# Altium PCB STC12C5A60S2 DEMO R1A.PcbDoc
Units mm, origin at the board's own origin, x right, y up, seen from the top; angles counter-clockwise.
Board outline 20.32 x 56.5 mm, 2 copper layers (Top Layer, Bottom Layer); 42 components, 59 nets, 186 pads, 32 vias.
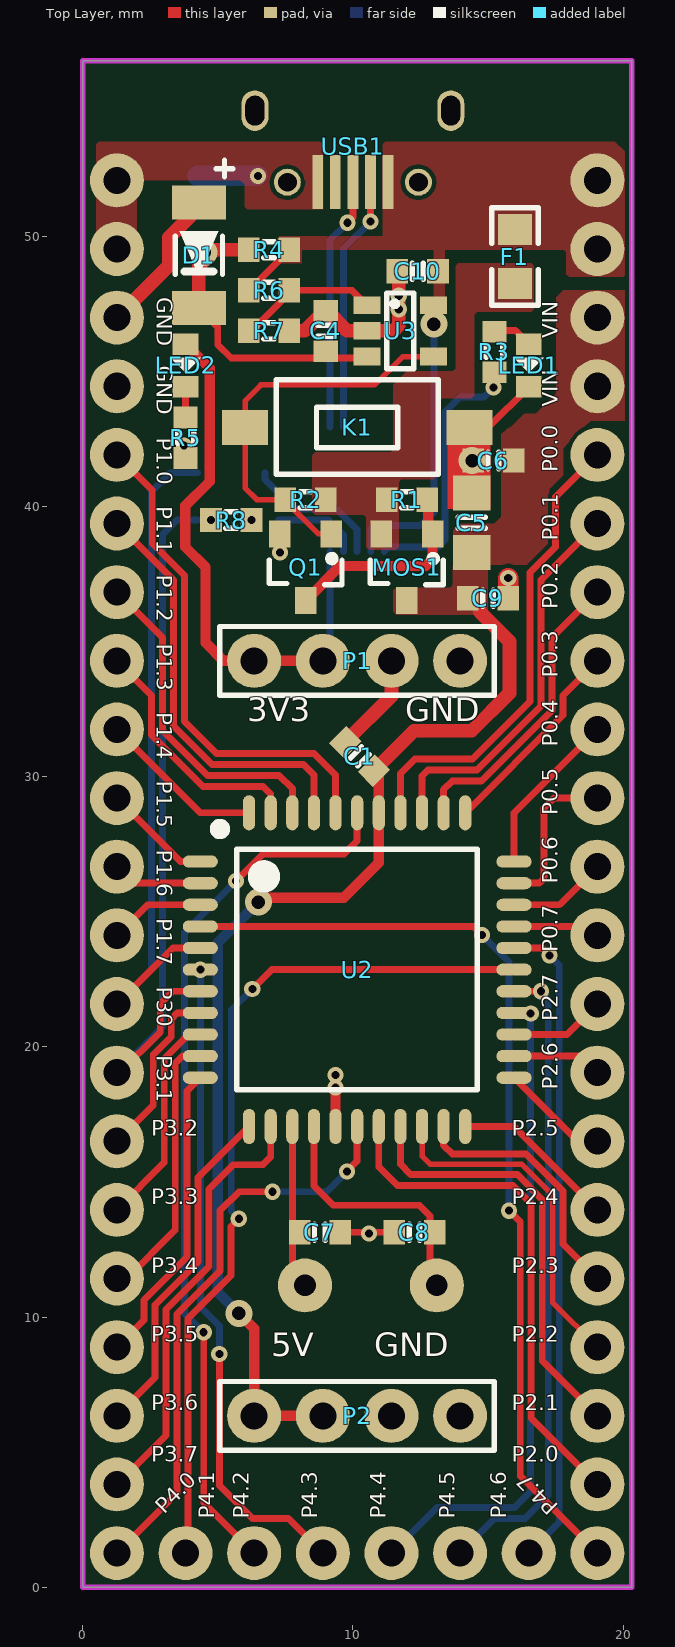
[diagram p0: Top Layer view]
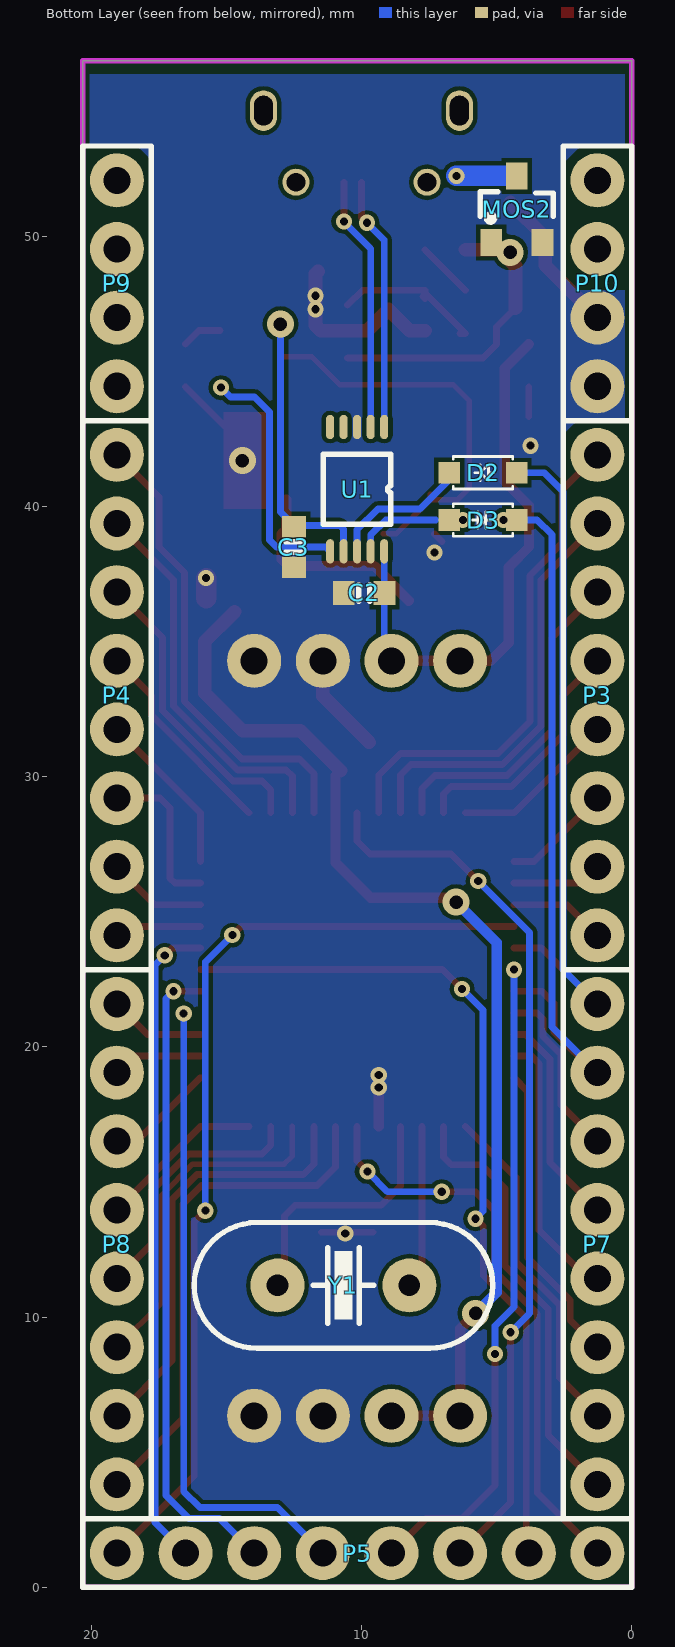
[diagram p1: Bottom Layer view, seen from below]

## Layer stack, top to bottom
Top Solder: solder mask 0.0102, Solder Resist, Dk 3.5
Top Layer: signal copper 0.0356
Dielectric1: dielectric 0.32, FR-4, Dk 4.8
Bottom Layer: signal copper 0.0356
Bottom Solder: solder mask 0.0102, Solder Resist, Dk 3.5

## Board outline
0,0 20.32,0 20.32,56.5 0,56.5

## Design rules (kind name [scope] priority, off if disabled: settings)
Clearance power [InNetClass('power') vs InNetClass('power')] p1: gap=0.254
Clearance [All] p2: gap=0.152
ComponentClearance [All] p1: gap=0 collisioncheckmode=3 verticalgap=0 showdistances=FALSE
PlaneConnect [All] p1: planeconnectstyle=Direct reliefexpansion=0.508 reliefentries=4 reliefconductorwidth=0.254 reliefairgap=0.254
PolygonConnect [All] p1: connectstyle=Direct reliefconductorwidth=0.254 reliefentries=4 polygonreliefangle="90 Angle" airgapwidth=0.254
RoutingVias [All] p1: holewidth=0.3 width=0.6 viastyle="Through Hole" minholewidth=0.3 minwidth=0.6 maxholewidth=6 maxwidth=6.3
SolderMaskExpansion [All] p1: expansion=0.102
Width [All] p1: maxlimit=25.4 minlimit=0.152 preferedwidth=0.254
28 further rules are at their usual default settings.

## Components (designator, comment, footprint, x,y, rotation, side; value= is the part's Value field where it differs from the comment)
C1 "0.1μF" C_0603 10.25,30.75 r135 top
C2 "0.1μF" C_0603 9.9,36.8 r180 bottom
C3 "0.1μF" C_0603 12.5,38.5 r90 bottom
C4 "10nF" C_0603 9,46.5 r90 top
C5 "22μF" C_0805 14.4,39.4 r90 top
C6 "10μF" C_0603 15.2,41.7 r180 top
C7 "22pF" C_0603 8.78,13.14 r0 top
C8 "22pF" C_0603 12.28,13.14 r180 top
C9 "10μF" C_0603 15,36.6 r0 top
C10 "0.1μF" C_0603 12.4,48.7 r180 top
D1 "ZMM3V3" SOD_80 4.3,49.3 r270 top
D2 "1N4148WS" SOD_323 5.5,41.25 r0 bottom
D3 "1N4148WS" SOD_323 5.5,39.5 r180 bottom
F1 "6V 1.1A 0805" FB_0805 16,49.25 r270 top
K1 "TACT SWITCH_2_SMD" "TACT SWITCH_2_SMD" 10.16,42.926 r180 top
LED1 "LED_0603-B" LED_0603-B 16.51,45.22 r270 top
LED2 "LED_0603-G" LED_0603-G 3.81,45.22 r270 top
MOS1 "SI2301" SOT_23_3 12,37.75 r180 top
MOS2 "AO3400A" SOT_23_3 4.25,51 r180 bottom
P1 "PIN4" PIN_4 10.16,34.29 r180 top
P2 "PIN4" PIN_4 10.16,6.35 r180 top
P3 "PIN8" PIN_8 1.27,33.02 r270 bottom
P4 "PIN8" PIN_8 19.05,33.02 r90 bottom
P5 "PIN8" PIN_8 10.16,1.27 r0 bottom
P7 "PIN8" PIN_8 1.27,12.7 r270 bottom
P8 "PIN8" PIN_8 19.05,12.7 r90 bottom
P9 "PIN4" PIN_4 19.05,48.26 r270 bottom
P10 "PIN4" PIN_4 1.27,48.26 r270 bottom
Q1 "2N7002" SOT_23_3 8.25,37.75 r180 top
R1 "100kΩ" R_0603 12,40.25 r180 top
R2 "47kΩ" R_0603 8.25,40.25 r0 top
R3 "2.2KΩ" R_0603 15.24,45.72 r90 top
R4 "470Ω" R_0603 6.9,49.5 r0 top
R5 "2.2KΩ" R_0603 3.81,42.545 r270 top
R6 "22kΩ" R_0603 6.9,48 r180 top
R7 "33kΩ" R_0603 6.9,46.5 r180 top
R8 "100Ω" R_0603 5.5,39.5 r180 top
U1 "CH340E" MSOP_10 10.16,40.64 r270 bottom
U2 "STC12LEXXS2" LQFP_44 10.16,22.86 r270 top locked
U3 "TL331" SOT_23_5 11.75,46.5 r270 top
USB1 "MICRO USB B" "MICRO USB B" 10,52 r0 top
Y1 "11.0592MHz" CRYSTAL_HC_49US 10.668,11.176 r0 bottom

## Footprints (in the part's own frame and the unit in brackets; to place one, negate y for a bottom-side part, rotate by r counter-clockwise, add the part's x,y. Pads: shape width x height; smd on the part's side, far side on the other; paste and mask are expansions set on the pad)
C_0603 [mm]
  rect 0.8x0.9 smd: 1(-0.75,0) 2(0.75,0)
  silkscreen extent -0.2,-0.3 0.2,0.3, body extent -0.76,-0.39 0.76,0.39, height 0.9
C_0805 [mm]
  rect 1.3x1.4 smd: 1(-1.1,0) 2(1.1,0)
  silkscreen extent -0.2,-0.5 0.2,0.5, body extent -1,-0.63 1,0.62, height 0.78
CRYSTAL_HC_49US [mm]
  round 2 hole 0.8: 1(-2.44,0) 2(2.44,0)
  silkscreen extent -5.53,-2.33 5.53,2.32, body extent -5.52,-2.32 5.53,2.33, height 2.49
FB_0805 [mm]
  rect 1.14x1.27 smd: 1(-1.003,0) 2(1.003,0)
  silkscreen extent -1.8,-0.86 1.8,0.86, body extent -1,-0.62 1,0.63, height 0.85
LED_0603-B [mm]
  rect 0.8x0.96 smd: 1(-0.79,0) 2(0.79,0)
  silkscreen extent -0.28,-0.56 0.28,0.56, body extent -0.85,-0.45 0.85,0.45, height 0.9
LED_0603-G [mm]
  rect 0.8x0.96 smd: 1(-0.79,0) 2(0.79,0)
  silkscreen extent -0.28,-0.56 0.28,0.56, body extent -0.85,-0.45 0.85,0.45, height 0.9
LQFP_44 [mm]
  oval 0.45x1.3 smd: 1(-4,-5.804) 2(-3.2,-5.804) 3(-2.4,-5.804) 4(-1.6,-5.804) 5(-0.8,-5.804) 6(0,-5.804) 7(0.8,-5.804) 8(1.6,-5.804) 9(2.4,-5.804) 10(3.2,-5.804) 11(4,-5.804) 23(4,5.804) 24(3.2,5.804) 25(2.4,5.804) 26(1.6,5.804) 27(0.8,5.804) 28(0,5.804) 29(-0.8,5.804) 30(-1.6,5.804) 31(-2.4,5.804) 32(-3.2,5.804) 33(-4,5.804)
  oval 1.3x0.45 smd: 12(5.804,-4) 13(5.804,-3.2) 14(5.804,-2.4) 15(5.804,-1.6) 16(5.804,-0.8) 17(5.804,0) 18(5.804,0.8) 19(5.804,1.6) 20(5.804,2.4) 21(5.804,3.2) 22(5.804,4) 34(-5.804,4) 35(-5.804,3.2) 36(-5.804,2.4) 37(-5.804,1.6) 38(-5.804,0.8) 39(-5.804,0) 40(-5.804,-0.8) 41(-5.804,-1.6) 42(-5.804,-2.4) 43(-5.804,-3.2) 44(-5.804,-4)
  silkscreen extent -5.33,-5.2 4.45,4.45, body extent -6,-6 6,6, height 1.68
"MICRO USB B" [mm]
  oval 1x1.5 hole 0.7 slot 1.1 at 90 deg: 0(-3.625,2.65) 0(3.625,2.65)
  round 1 hole 0.7: 0(-2.425,0) 0(2.425,0)
  rect 0.4x2 smd: 1(1.3,0) 2(0.65,0) 3(0,0) 4(-0.65,0) 5(-1.3,0)
  body extent -4.1,-0.11 4.1,5.32, height 2.63
MSOP_10 [mm]
  oval 0.9x0.3 smd: 1(-2.3,1) 2(-2.3,0.5) 3(-2.3,0) 4(-2.3,-0.5) 5(-2.3,-1) 6(2.3,-1) 7(2.3,-0.5) 8(2.3,0) 9(2.3,0.5) 10(2.3,1)
  round 0.5 on Bottom Overlay: 1(-0.8,0.7)
  silkscreen extent -1.3,-1.25 1.3,1.25, body extent -2.51,-1.5 2.51,1.5, height 1.05
PIN_4 [mm]
  round 2 hole 1: 1(-3.81,0) 2(-1.27,0) 3(1.27,0) 4(3.81,0)
  silkscreen extent -5.08,-1.27 5.08,1.27, body extent -5.08,-1.27 5.08,1.27, height 8.51
PIN_8 [mm]
  round 2 hole 1: 1(-8.89,0) 2(-6.35,0) 3(-3.81,0) 4(-1.27,0) 5(1.27,0) 6(3.81,0) 7(6.35,0) 8(8.89,0)
  silkscreen extent -10.16,-1.27 10.16,1.27, body extent -10.16,-1.27 10.16,1.27, height 8.51
R_0603 [mm]
  rect 0.8x0.9 smd: 1(-0.75,0) 2(0.75,0)
  silkscreen extent -0.2,-0.3 0.2,0.3, body extent -0.76,-0.38 0.76,0.38, height 0.41
SOD_80 [mm]
  rect 1.25x2 smd: 1(-1.951,0) 2(1.951,0)
  silkscreen extent -3.52,-0.87 0.76,1.26, body extent -1.85,-0.85 1.85,0.85, height 1.7
SOD_323 [mm]
  rect 0.8x0.8 smd: 1(-1.25,0) 2(1.25,0)
  silkscreen extent -1.1,-0.6 1.1,0.6, body extent -1.3,-0.67 1.3,0.68, height 1.1
SOT_23_3 [mm]
  rect 0.8x1 smd: 1(-0.95,-1.235) 2(0.95,-1.235) 3(0,1.235)
  silkscreen extent -1.35,-0.45 1.35,0.65, body extent -1.45,-1.19 1.45,1.19, height 1.02
SOT_23_5 [mm]
  rect 0.65x1 smd: 1(-0.95,-1.235) 2(0,-1.235) 3(0.95,-1.235) 4(0.95,1.235) 5(-0.95,1.235)
  silkscreen extent -1.4,-0.5 1.4,0.5, body extent -1.45,-1.19 1.45,1.19, height 1.02
"TACT SWITCH_2_SMD" [mm]
  rect 1.7x1.3 smd: 1(-4.15,0) 2(4.15,0)
  silkscreen extent -3,-1.76 3,1.74, body extent -4,-1.8 4,1.8, height 2.4

## Part data
C1 C2 C3 C4 C6 C7 C8 C9 C10: library part C_0603
C5: library part C_0805
D1: library part ZMMxxV
F1: library part FUSE_0805
R1 R2 R3 R4 R5 R6 R7 R8: library part R_0603
U2: library part "STC12LE5AXXS2 - LQPF44"
Y1: library part Crystal_HC_49US

## Via types
v1: diameter 0.6, hole 0.3, Top Layer to Bottom Layer, 27 vias
v2: diameter 1, hole 0.5, Top Layer to Bottom Layer, 5 vias

## Nets (pads, with @x,y where several pads share a name; then routed paths per layer and width w, separated by ;. In a path a pad name is that pad's centre, name@x,y a point inside that pad or via, vN(x,y) a via of type N, cw(c..) or ccw(c..) an arc to the next point about the centre after c; other vN are vias at no path point)
3V3: C2.2 LED2.1 P1.3 P1.4 U1.10 | length 20.9
  Top Layer w0.381: LED2.1 4.7,45.12 4.7,40.925 3.8,40.025 3.8,38.5 4.55,37.75 4.55,34.95 5.21,34.29 P1.4 P1.3
  Bottom Layer w0.254: P1.3 9.16,34.56 U1.10
D+: U1.1@9.16,42.94 USB1.3 | length 9.4
  Top Layer w0.254: v1(9.8,50.5) 10,50.7 USB1.3
  Bottom Layer w0.254: U1.1@9.16,42.94 9.16,49.86 v1(9.8,50.5)
D-: U1.2 USB1.2 | length 9.5
  Top Layer w0.254: v1(10.65,50.55) USB1.2
  Bottom Layer w0.254: U1.2 9.66,49.541 10.65,50.531 v1(10.65,50.55)
GND: C1.2 C2.1 C3.1 C4.2 C5.2 C6.2 C7.2 C8.2 C9.2 C10.2 D1.1 K1.1 LED1.2 MOS2.2 P1.1 P1.2 P2.1 P2.2 P10.3 P10.4 Q1.2 R5.2 R7.1 U1.3 U2.16 U3.2 | length 24.1
  Top Layer w0.254: Q1.2@7.025,38.71 Q1.2 ; C7.2@9.57,13.14 C8.2@11.49,13.14 ; K1.1 15.006,42.926 LED1.2
  Top Layer w0.381: U2.16 v1(9.36,18.96)
  Top Layer w0.508: P10.3 3.2,48.92 3.2,49.951 D1.1@4.5,51.251 ; R7.1 8.21,46.5 9,47.29 9.79,46.5 U3.2 11.5,46.5 11.7,46.7 11.7,48.61 C10.2@11.61,48.7 ; C1.2 11.43,32.991 P1.2
  Top Layer w0.762: C5.2@14.31,40.59 C5.2 ; C9.2 v1(15.75,37.35)
  other v1: 10.6,13.1 9.36,18.5 7.3,38.3 3.75,42.25 11.7,47.3 11.7,47.8
  other v2: 14.41,41.7
NetC7_1: C7.1 U2.14 Y1.1 | length 6.5
  Top Layer w0.254: U2.14 7.76,10.882 Y1.1@7.974,10.668
NetC8_1: C8.1 U2.15 Y1.2 | length 10
  Top Layer w0.254: U2.15 8.56,14.86 9.28,14.14 12.46,14.14 12.854,13.746 Y1.2@12.854,10.668
NetD2_2: D2.2 U1.8 | length 5.2
  Bottom Layer w0.254: D2.2 6.75,41 7.844,39.906 9.394,39.906 10.16,39.14 U1.8
NetD3_1: D3.1 R8.1 U1.9 | length 3.2
  Bottom Layer w0.254: 7.25,39.5 9.1,39.5 9.66,38.94 U1.9
  other v1: 6.25,39.5
NetF1_2: F1.2 MOS1.2 R1.2 R2.2
NetK1_2: K1.2 Q1.1 R2.1 U3.4 | length 15
  Top Layer w0.203: R2.1@7.46,40.46 R2.1@7.46,40.25 ; Q1.1 8.725,38.985 R2.1@7.46,40.25 ; U3.4 11.85,45.55 10.8,44.5 6.6,44.5 6.01,43.91 K1.2 6.01,40.69 6.45,40.25 R2.1@7.46,40.25
NetLED1_1: LED1.1 R3.2 | length 1.5
  Top Layer w0.254: R3.2@15.24,46.51 16.01,46.51 LED1.1
NetLED2_2: LED2.2 R5.1 | length 1.1
  Top Layer w0.254: R5.1@3.81,43.335 LED2.2
NetMOS1_1: MOS1.1 Q1.3 R1.1 | length 7.6
  Top Layer w0.381: Q1.3 9.535,37.8 12.7,37.8 12.95,38.05 MOS1.1 12.79,39.145 R1.1@12.79,40.25
NetP3_1: P3.1 U2.40 | length 18.7
  Top Layer w0.254: P3.1 2.575,40.605 2.575,38.64 3.769,37.446 3.769,32.045 4.954,30.859 8.561,30.859 9.36,30.06 U2.40
NetP3_2: P3.2 U2.41 | length 15.7
  Top Layer w0.254: P3.2 3.362,37.278 3.362,31.877 4.786,30.453 8.167,30.453 8.56,30.06 U2.41
NetP3_3: P3.3 U2.42 | length 12.4
  Top Layer w0.254: P3.3 2.956,35.144 2.956,31.708 4.618,30.046 7.274,30.046 7.76,29.56 U2.42
NetP3_4: P3.4 U2.43 | length 9.3
  Top Layer w0.254: P3.4 2.549,33.011 2.549,31.54 4.449,29.64 6.68,29.64 6.96,29.36 U2.43
NetP3_5: P3.5 U2.44 | length 6.2
  Top Layer w0.254: P3.5 4.356,28.664 U2.44
NetP3_6: P3.6 U2.1 | length 4.1
  Top Layer w0.254: P3.6 3.62,26.86 U2.1
NetP3_7: P3.7 U2.2 | length 3.3
  Top Layer w0.254: P3.7 1.88,26.06 U2.2
NetP3_8: P3.8 U2.3 | length 3.6
  Top Layer w0.254: P3.8 2.4,25.26 U2.3
NetP4_1: P4.1 U2.30 | length 3.2
  Top Layer w0.254: U2.30 18.72,24.46 P4.1
NetP4_2: P4.2 U2.31 | length 3.7
  Top Layer w0.254: U2.31 17.64,25.26 P4.2
NetP4_3: P4.3 U2.32 | length 5.9
  Top Layer w0.254: U2.32 16.9,26.06 17.08,26.24 17.08,28.84 17.45,29.21 P4.3
NetP4_4: P4.4 U2.33 | length 6.2
  Top Layer w0.254: U2.33 15.964,28.664 P4.4
NetP4_5: P4.5 U2.34 | length 7.7
  Top Layer w0.254: U2.34 17.771,32.275 17.771,33.011 P4.5
NetP4_6: P4.6 U2.35 | length 11.2
  Top Layer w0.254: U2.35 13.36,29.52 13.68,29.84 14.761,29.84 17.364,32.443 17.364,35.144 P4.6
NetP4_7: P4.7 U2.36 | length 14.5
  Top Layer w0.254: U2.36 12.56,30.02 12.786,30.246 14.593,30.246 16.958,32.611 16.958,37.278 P4.7
NetP4_8: P4.8 U2.37 | length 17.5
  Top Layer w0.254: U2.37 11.76,30.12 12.293,30.653 14.425,30.653 16.551,32.78 16.551,37.551 17.5,38.5 17.5,40.36 P4.8
NetP5_1: P5.1 U2.17 | length 21.4
  Top Layer w0.254: P5.1 3.494,3.494 3.494,10.121 5.086,11.713 5.086,13.946 5.78,14.64 v1(7.03,14.64) ; v1(9.78,15.39) 10.16,15.77 U2.17
  Bottom Layer w0.254: v1(7.03,14.64) 9.03,14.64 v1(9.78,15.39)
NetP5_2: P5.2 U2.28 | length 32.2
  Top Layer w0.254: P5.2 P5.2@3.901,1.361 ; P5.2@3.999,1.459 P5.2@3.901,1.361 ; v1(5.78,13.64) 5.493,13.353 5.493,11.545 3.901,9.952 P5.2@3.901,1.361 ; v1(6.28,22.14) 7,22.86 U2.28
  Bottom Layer w0.254: v1(5.78,13.64) 5.5,13.92 5.5,21.36 v1(6.28,22.14)
NetP5_3: P5.3 U2.39 | length 32.9
  Top Layer w0.254: v1(4.48,9.44) 4.48,3.14 P5.3 ; v1(5.68,26.14) 6.68,27.14 9.68,27.14 10.16,27.62 U2.39
  Bottom Layer w0.254: v1(4.48,9.44) 3.777,10.143 3.777,24.237 v1(5.68,26.14)
NetP5_4: P5.4 U2.6 | length 24.5
  Top Layer w0.254: v1(5.059,8.64) 5.059,3.77 6.28,2.549 7.611,2.549 P5.4 P5.4@8.656,1.27
  Bottom Layer w0.254: v1(4.356,22.86) 4.356,10.383 5.059,9.68 v1(5.059,8.64)
NetP5_5: P5.5 U2.26 | length 23.8
  Bottom Layer w0.254: P5.5 13.116,2.956 15.98,2.956 16.58,3.556 v1(16.58,21.24)
NetP5_6: P5.6 U2.27 | length 23.9
  Top Layer w0.254: U2.27 v1(16.96,22.06)
  Bottom Layer w0.254: P5.6 15.249,2.549 16.38,2.549 17.231,3.4 17.231,21.789 v1(16.96,22.06)
NetP5_7: P5.7 U2.29 | length 24.2
  Top Layer w0.254: U2.29 17.01,23.66 v1(17.28,23.39)
  Bottom Layer w0.254: P5.7 17.637,2.397 17.637,23.033 v1(17.28,23.39)
NetP7_3: P7.3 U2.8 | length 6.5
  Top Layer w0.254: P7.3 2.614,17.854 2.614,19.723 3.28,20.389 3.28,21.04 3.5,21.26 U2.8
NetP7_4: P7.4 U2.9 | length 8
  Top Layer w0.254: P7.4 3.02,15.72 3.02,19.555 3.925,20.46 U2.9
NetP7_5: P7.5 U2.10 | length 10.1
  Top Layer w0.254: P7.5 1.64,11.43 3.427,13.217 3.427,19.387 3.7,19.66 U2.10
NetP7_6: P7.6 U2.11 | length 11.2
  Top Layer w0.254: P7.6 2.275,9.895 2.275,10.626 3.867,12.218 3.867,18.371 U2.11
NetP7_7: P7.7 U2.12 | length 12.7
  Top Layer w0.254: P7.7 2.681,7.761 2.681,10.457 4.274,12.05 4.274,15.17 U2.12
NetP7_8: P7.8 U2.13 | length 16.2
  Top Layer w0.254: P7.8 3.088,5.628 3.088,10.289 4.68,11.881 4.68,14.74 5.58,15.64 6.68,15.64 6.96,15.92 U2.13
NetP8_1: P8.1 U2.18 | length 19.1
  Top Layer w0.254: U2.18 10.96,15.56 11.648,14.872 15.921,14.872 16.602,14.191 16.602,6.258 P8.1
NetP8_2: P8.2 U2.19 | length 16
  Top Layer w0.254: U2.19 11.76,15.66 12.142,15.278 16.09,15.278 17.009,14.359 17.009,8.391 P8.2
NetP8_3: P8.3 U2.20 | length 12.8
  Top Layer w0.203: U2.20 12.56,15.96 12.861,15.659 16.247,15.659 17.39,14.517 17.39,10.55 P8.3
NetP8_4: P8.4 U2.21 | length 10
  Top Layer w0.254: U2.21 13.36,16.36 13.68,16.04 16.405,16.04 17.771,14.675 17.771,12.709 P8.4 P8.4@18.648,11.43
NetP8_5: P8.5 U2.22 | length 6.2
  Top Layer w0.254: U2.22 15.964,17.056 P8.5
NetP8_6: P8.6 U2.23 | length 4.1
  Top Layer w0.254: U2.23 18.314,16.51 P8.6
NetP8_7: P8.7 U2.24 | length 3.3
  Top Layer w0.254: U2.24 18.44,19.66 P8.7
NetP8_8: P8.8 U2.25 | length 3.6
  Top Layer w0.254: U2.25 17.92,20.46 P8.8
NetR3_1: R3.1 U1.6 | length 9.3
  Bottom Layer w0.254: U1.6 11.32,38.5 13.15,38.5 13.406,38.756 13.406,43.5 13.956,44.05 14.85,44.05 v1(15.2,44.4)
NetR6_1: R6.1 R7.2 U3.1 | length 5.6
  Top Layer w0.254: R7.2@6.35,46.4 6.15,46.4 7.65,47.9 R6.1 9.965,48 U3.1 ; R6.1@7.65,47.7 R6.1@7.719,47.769
RST: P5.8 U2.4 | length 35.2
  Top Layer w0.254: U2.4 14.46,24.46 v1(14.78,24.14) ; v1(15.78,13.94) 16.196,13.524 16.196,4.124 P5.8
  Bottom Layer w0.254: v1(14.78,24.14) 15.78,23.14 v1(15.78,13.94)
RXD: D2.1 P7.1 U2.5 | length 25.4
  Top Layer w0.254: P7.1 3.34,23.66 U2.5
  Bottom Layer w0.254: P7.1 2.549,22.869 2.549,40.549 3.25,41.25 D2.1
TXD: D3.2 P7.2 R8.2 U2.7 | length 27.1
  Top Layer w0.254: P7.2 1.366,19.05 2.874,20.558 2.874,21.615 3.319,22.06 U2.7
  Bottom Layer w0.254: P7.2 2.956,20.736 2.956,38.956 3.5,39.5 D3.2
  other v1: 4.75,39.5
V-: MOS2.3 P10.1 P10.2 USB1.5 | length 2.2
  Bottom Layer w0.762: MOS2.3 v1(6.485,52.235)
VCC: C1.1 C5.1 C6.1 C9.1 MOS1.3 P2.3 P2.4 P9.3 P9.4 U2.38 | length 41
  Top Layer w0.381: v2(5.78,10.14) 6.35,9.57 P2.4 P2.3 ; v2@6.28,25.14 v2(6.5,25.36) 6.665,25.525 9.665,25.525 10.96,26.82 U2.38 C1.1@10.96,30.04
  Top Layer w0.508: C1.1 12.261,31.7 14.4,31.7 15.8,33.1 15.8,35 14.7,36.1
  Bottom Layer w0.381: v2(5.78,10.14) 4.999,10.921 4.999,23.859 v2(6.5,25.36)
VIN: C3.2 C10.1 F1.1 P9.1 P9.2 R4.2 R6.2 U1.7 U3.5 USB1.1 | length 12.5
  Top Layer w0.254: R6.2 R4.2
  Bottom Layer w0.254: U1.7 10.66,39.16 10.79,39.29 12.5,39.29 13,39.79 v2(13,46.75)
VREF: C4.1 D1.2 MOS2.1 R4.1 U3.3 | length 11
  Top Layer w0.254: D1.2 5,46.649 5,46 5.5,45.5 U3.3@10.515,45.5
  Top Layer w0.508: D1.2 4.3,48.9 4.9,49.5 R4.1
  other v2: 4.5,49.4
pads on no net: U1.1@9.46,41.44 U1.4 U1.5 USB1.0 USB1.4

## Polygon pours and split planes (outlines as drawn)
VIN on Top Layer "Top Layer-No Net" (solid, pour order 18): 11.1,51 11.1,53.4 11.2,53.5 17.4,53.5 19.7,53.5 20.063,53.137 20.063,50.807 11.293,50.807 11.1,51
V- on Top Layer "Top Layer-No Net" (solid, pour order 17): 8.9,51 8.9,53.4 8.8,53.5 1.9,53.5 0.6,53.5 0.5,53.4 0.5,52.07 8.23,52.07 8.3,52 8.3,51 8.9,51
VIN on Top Layer "Top Layer-No Net" (solid, pour order 13): 12.5,47.7 12.5,47.2 13.4,47.2 13.4,50.7 11.9,50.7 11.9,49.6 13,49.6 13,47.7 12.5,47.7
VIN on Top Layer "Bottom Layer-No Net" (solid, pour order 11): 16.6,50.9 16.6,49.5 17.8,49.5 17.9,49.4 17.9,48.6 18,48.5 20,48.5 20.1,48.6 20.1,53.1 20,53.2 18,53.2 17.9,53.1 17.8,53 17.8,51 17.7,50.9 16.6,50.9 16.6,49.6 16.7,49.5
VCC on Top Layer "Top Solder-No Net" (solid, pour order 15): 17.78,47.752 18.034,48.006 20.066,48.006 20.32,47.752 20.32,43.434 20.066,43.18 18.796,43.18 17.78,42.164 17.78,41.148 17.272,40.64 17.272,38.608 16.51,37.846 13.716,37.846 13.716,39.116 13.97,39.37 15.24,39.37 15.494,39.624 15.494,42.672 16.256,43.434 16.764,43.434 17.526,44.196 17.526,47.752 17.78,48.006 18.034,48.006
VCC on Top Layer "Top Solder-No Net" (solid, pour order 20): 13.7,37.8 13.7,37.1 13.6,37 11.6,37 11.5,36.9 11.5,36.1 11.6,36 14.9,36 15,36.1 15,37.8 13.7,37.8
VIN on Top Layer "Top Layer-No Net 1" (solid, pour order 14): 11.1,52.5 11.5,52.5 11.5,51 17,51 17,49.5 13.5,49.5 12.7,49.5 8.1,49.5 8.1,49 7.2,49 7.2,49.9 7.3,50 11.1,50 11.1,53
V- on Top Layer "Top Layer-No Net 1" (solid, pour order 19): 8.9,51 6.1,51 6,51.1 6,51.9 5.8,52.1 2.2,52.1 2,51.9 2,49.1 1.9,49 0.6,49 0.5,49.1 0.5,52.6 0.6,52.6 1,53 3.9,53 8.9,53
NetF1_2 on Top Layer "Top Layer-No Net" (solid, pour order 23): 13.8,48.9 13.9,49 16.6,49 16.7,48.9 16.7,47.3 16.6,47.2 14.6,47.2 14.5,47.1 14.5,44.1 14.4,44 13.3,44 13.2,43.9 13.2,41.2 13,41 11.8,41 11.7,40.9 11.7,38.5 11.6,38.4 10.6,38.4 10.5,38.5 10.5,39.6 10.4,39.7 8.6,39.7 8.5,39.8 8.5,41.9 8.6,42 11.4,42 11.5,42.1 11.5,44.5 12,45 12.6,45 13.7,45 13.8,45.1
GND on Bottom Layer "Top Layer-No Net" (solid, pour order 12): 0,56 20.32,56 20.32,0 0,0

## Keep-outs
Keep-Out Layer:
  the board outline again, w0.2

## Other copper
Top Layer:
  rectangle net GND: 13.5,39.9 15.1,43.5
Bottom Layer:
  pour cut-out: 0,53.34 1.905,53.34 2.54,52.705 2.54,48.514 2.026,48 0,48
  pour cut-out: 0,43.18 2.032,43.18 2.54,42.672 2.54,2.54 0,2.54
  pour cut-out: 18.288,53.34 20.32,53.34 20.32,2.5 20.28,2.54 17.78,2.54 17.78,52.832
  pour cut-out: 0,2.54 20.32,2.54 20.32,0 0,0

## Silkscreen, mask and mechanical layers (free items; w line width, h text height)
Top Overlay:
  text "GND" at 2.54,47.752 h1 r270
  text "VIN" at 17.78,46.228 h1 r90
  text "GND" at 2.54,45.212 h1 r270
  text "VIN" at 17.78,43.688 h1 r90
  text "P1.0" at 2.54,42.545 h1 r270
  text "P0.0" at 17.78,41.275 h1 r90
  text "P1.1" at 2.54,40.005 h1 r270
  text "P0.1" at 17.78,38.735 h1 r90
  text "P1.2" at 2.54,37.465 h1 r270
  text "P0.2" at 17.78,36.195 h1 r90
  text "P1.3" at 2.54,34.925 h1 r270
  text "P0.3" at 17.78,33.655 h1 r90
  text "P1.4" at 2.54,32.385 h1 r270
  text "3V3" at 6.096,31.75 h1.5
  text "GND" at 11.938,31.75 h1.5
  text "P0.4" at 17.78,31.115 h1 r90
  text "P1.5" at 2.54,29.845 h1 r270
  text "P0.5" at 17.78,28.575 h1 r90
  text "P1.6" at 2.54,27.305 h1 r270
  text "P0.6" at 17.78,26.035 h1 r90
  text "P1.7" at 2.54,24.765 h1 r270
  text "P0.7" at 17.78,23.495 h1 r90
  text "P30" at 2.54,22.225 h1 r270
  text "P2.7" at 17.78,20.955 h1 r90
  text "P3.1" at 2.54,19.685 h1 r270
  text "P2.6" at 17.78,18.415 h1 r90
  text "P3.2" at 2.54,16.51 h1
  text "P2.5" at 15.875,16.51 h1
  text "P3.3" at 2.54,13.97 h1
  text "P2.4" at 15.875,13.97 h1
  text "P3.4" at 2.54,11.43 h1
  text "P2.3" at 15.875,11.43 h1
  text "P3.5" at 2.54,8.89 h1
  text "P2.2" at 15.875,8.89 h1
  text "5V" at 6.985,8.255 h1.5
  text "GND" at 10.795,8.255 h1.5
  text "P3.6" at 2.54,6.35 h1
  text "P2.1" at 15.875,6.35 h1
  text "P3.7" at 2.54,4.445 h1
  text "P2.0" at 15.875,4.445 h1
  text "P4.7" at 17.78,3.175 h1 r135
  text "P4.0" at 3.175,2.54 h1 r45
  text "P4.1" at 5.08,2.54 h1 r90
  text "P4.2" at 6.35,2.54 h1 r90
  text "P4.3" at 8.89,2.54 h1 r90
  text "P4.4" at 11.43,2.54 h1 r90
  text "P4.5" at 13.97,2.54 h1 r90
  text "P4.6" at 15.875,2.54 h1 r90
Top Solder:
  rectangle: 13.9,44.4 14.4,48.6